# EAGLE board BREAKOUT_GUVC (EAGLE 9.5.2)
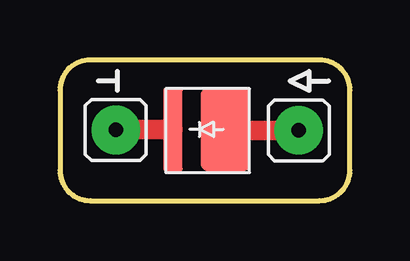
[diagram p0: board, top side]

Size 12.1 x 5.88 mm. Coordinates in mm from the lower left corner, seen from the top.
Outline: 12.1,1.27 12.1,4.61 arc90 10.83,5.88 1.27,5.88 arc90 0,4.61 0,1.27 arc90 1.27,0 10.83,0 arc90 12.1,1.27
Copper layers (1*16): Top 0.035mm / dielectric 1.5mm / Bottom 0.035mm
Design rules "default": minimum track width 6mil, minimum drill 0.35mm, track to track 6mil, track to pad 6mil, pad to pad 6mil, via to via 6mil, smd to smd 6mil, copper to edge 40mil, drill to drill 6mil, minimum pad ring 10mil, minimum via ring 8mil, stop-mask expansion 4mil, vias tented up to drill 0mil, thermal gap 10mil

## Footprints (pad centres in the part's own frame; a part is rotated, then mirrored left to right if it is on the bottom)
JP0 = drill 0.6 pad 2.032: 1 0,0
GUVD-S10GD = smd 2.1 x 3.5: ANODE 2.5,-1.7 | smd 0.8 x 3.5: CATHODE 0.3,-1.7

## Placement (x,y rotation side)
1  JP0  [JP0]  9.96,2.94 0 top
2  JP0  [JP0]  2.33,2.96 0 top
U$1  GUVC-S10GD  [GUVD-S10GD]  4.41,4.68 0 top

## Library data of the parts
1 2 = jumper-4
U$1 = GUVC-S10GD

## Nets
N$1: 1.1 U$1.ANODE
N$2: 2.1 U$1.CATHODE

## Tracks (layer width: path | path; a pad name or v marks a point on that pad's centre or on a via)
N$1
  Top 0.813: 1.1 6.95,2.94
  Top 1.27: 6.95,2.94 U$1.ANODE
N$2
  Top 0.813: 2.1 2.35,2.98 U$1.CATHODE